# EAGLE board subsystem_wiring (EAGLE 9.7.0)

Size 214.3 x 239.77 mm. Coordinates in mm from the lower left corner, seen from the top.
Outline: 0,0 214.3,0 214.3,239.77 0,239.77 0,0
Copper layers (1*16): Top 0.035mm / dielectric 1.5mm / Bottom 0.035mm
Design rules "default": minimum track width 6mil, minimum drill 0.35mm, track to track 6mil, track to pad 6mil, pad to pad 6mil, via to via 6mil, smd to smd 6mil, copper to edge 40mil, drill to drill 6mil, minimum pad ring 10mil, minimum via ring 8mil, stop-mask expansion 4mil, vias tented up to drill 0mil, thermal gap 10mil

## Footprints (pad centres in the part's own frame; a part is rotated, then mirrored left to right if it is on the bottom)
BATTERY-GENERIC = drill 1.118 pad 3.15 octagon: + 2.54,0; - -2.54,0
CAP-THRU-2.54MM = drill 1.016 pad 1.88: 1 -1.27,0; 2 1.27,0
DIODE-AXIAL = drill 1: 1 -5.08,0; 2 5.08,0
1X02 = drill 1.016 long: 1 -1.27,0; 2 1.27,0
WS2812-STRIP = drill 1.016 long: 1 -3.81,0; 2 -1.27,0; 3 1.27,0; 4 3.81,0
MOTOR = drill 1.118 pad 3.15 octagon: + 2.54,0; - -2.54,0
RESAD1016W63L850D250B = drill 0.83 pad 1.43: 1 -5.08,0; 2 5.08,0
HA-06-SM065 = drill 1 pad 1.676: 1 -2.54,-2.54; 2 0,2.54; 3 2.54,-2.54
SWITCH-MOMENTARY-PTH-6.5MM = drill 1.016 pad 1.88: 1 -3.251,2.261; 2 3.251,2.261; 3 -3.251,-2.261; 4 3.251,-2.261
TO92 = drill 0.813 octagon: 1 -1.27,0; 2 0,1.905; 3 1.27,0
TO220BV = drill 1.016 long: D 0,-2.54; G -2.54,-2.54; S 2.54,-2.54
ARDUINO-UNO-R3-SHIELD = drill 1.016 pad 1.88: 3.3V 24.13,-2.54; 5V 24.13,0; A0 24.13,12.7; A1 24.13,15.24; A2 24.13,17.78; A3 24.13,20.32; A4 24.13,22.86; A5 24.13,25.4; AREF -24.13,-13.97; D2 -24.13,20.32; D3 -24.13,17.78; D4 -24.13,15.24; D5 -24.13,12.7; D6 -24.13,10.16; D7 -24.13,7.62; D8 -24.13,3.81; D9 -24.13,1.27; D10 -24.13,-1.27; D11 -24.13,-3.81; D12 -24.13,-6.35; D13 -24.13,-8.89; GND@0 24.13,2.54; GND@1 24.13,5.08; GND@2 -24.13,-11.43; IOREF 24.13,-7.62; NC 24.13,-10.16; RES 24.13,-5.08; RX -24.13,25.4; SCL -24.13,-19.05; SDA -24.13,-16.51; TX -24.13,22.86; VIN 24.13,7.62
JHD-162A = drill 1.016 long: 1 -19.05,0; 2 -16.51,0; 3 -13.97,0; 4 -11.43,0; 5 -8.89,0; 6 -6.35,0; 7 -3.81,0; 8 -1.27,0; 9 1.27,0; 10 3.81,0; 11 6.35,0; 12 8.89,0; 13 11.43,0; 14 13.97,0; 15 16.51,0; 16 19.05,0

## Placement (x,y rotation side)
BAT1  6V  [BATTERY-GENERIC]  193.46,134.9 0 top
C1  1000u  [CAP-THRU-2.54MM]  118.84,211.82 330 top
D1  DIODEDIODE-AXIAL  [DIODE-AXIAL]  13.5,71.18 0 top
DCONVEYOR_MOTOR_DIODE  DIODEDIODE-AXIAL  [DIODE-AXIAL]  207.97,167.8 90 top
L1  LIGHTBULB  [1X02]  102.29,43.97 0 top
LEDLED_STRIP  WS2812B_STRIP  [WS2812-STRIP]  115.59,199.45 270 top
MCONVEYOR_FAN_MOTOR  MOTOR_HDR  [MOTOR]  192.09,172.73 0 top
MCOOLING_FAN  MOTOR_HDR  [MOTOR]  8.26,86.3 0 top
P1  BATTERYGENERIC  [BATTERY-GENERIC]  103.61,8.26 180 top
R1  220  [RESAD1016W63L850D250B]  95.33,123.08 0 top
R6  1k  [RESAD1016W63L850D250B]  23.13,100.32 270 top
RCONVEYOR_MOTOR_RESISTOR  1k  [RESAD1016W63L850D250B]  131.36,175.05 0 top
RHEATING_ELEMENT_GATE_RESISTOR_1  100k  [RESAD1016W63L850D250B]  87.79,82.18 0 top
RHEATING_ELEMENT_RESISTOR_2  220  [RESAD1016W63L850D250B]  98.1,113.43 90 top
RLED_STRIP_RESISTOR  470  [RESAD1016W63L850D250B]  104.98,181.38 0 top
RPOTBAKE_KNOB  250k  [HA-06-SM065]  75.74,103.18 0 top
SCANCEL_BUTTON  SWITCH_MOMENTARY  [SWITCH-MOMENTARY-PTH-6.5MM]  138.14,151.82 90 top
SCONFIRM_BUTTON  SWITCH_MOMENTARY  [SWITCH-MOMENTARY-PTH-6.5MM]  122.07,152.36 90 top
T4  NPN  [TO92]  33.81,90.73 0 top
TCONVEYOR_MOTOR_TRANSISTOR  NPN  [TO92]  157.13,176.97 0 top
THEATING_ELEMENT_KNOB_(REPLACE_W/_SSR)  NMOSFET  [TO220BV]  131.17,87.37 0 top
UARDUINO  ARDUINO-UNO-R3-SHIELD  [ARDUINO-UNO-R3-SHIELD]  65.74,159.64 270 top
ULCD_DISPLAY  LCD-16X2JHD-162A  [JHD-162A]  48.06,232.23 0 top

## Library data of the parts
BAT1 C1 D1 DCONVEYOR_MOTOR_DIODE L1 LEDLED_STRIP MCONVEYOR_FAN_MOTOR MCOOLING_FAN P1 R1 R6 RCONVEYOR_MOTOR_RESISTOR RHEATING_ELEMENT_GATE_RESISTOR_1 RHEATING_ELEMENT_RESISTOR_2 RLED_STRIP_RESISTOR RPOTBAKE_KNOB SCANCEL_BUTTON SCONFIRM_BUTTON UARDUINO ULCD_DISPLAY = Tinkercad
T4 TCONVEYOR_MOTOR_TRANSISTOR = Tinkercad; CATEGORY: Transistor; SUB-CATEGORY: BJT; TYPE: NPN
THEATING_ELEMENT_KNOB_(REPLACE_W/_SSR) = Tinkercad; CATEGORY: Transistor; SUB-CATEGORY: MOSFET; TYPE: N-Channel

## Nets
BAT1+: BAT1.+ DCONVEYOR_MOTOR_DIODE.2 MCONVEYOR_FAN_MOTOR.+
BAT1-: BAT1.- C1.2 LEDLED_STRIP.3 P1.- RHEATING_ELEMENT_GATE_RESISTOR_1.1 RPOTBAKE_KNOB.1 SCANCEL_BUTTON.4 SCONFIRM_BUTTON.4 T4.3 TCONVEYOR_MOTOR_TRANSISTOR.3 THEATING_ELEMENT_KNOB_(REPLACE_W/_SSR).S UARDUINO.GND@0 UARDUINO.GND@1 UARDUINO.GND@2 ULCD_DISPLAY.1 ULCD_DISPLAY.3 ULCD_DISPLAY.16
L1_2: L1.2 THEATING_ELEMENT_KNOB_(REPLACE_W/_SSR).D
LEDLED_STRIP_DIN: LEDLED_STRIP.1 RLED_STRIP_RESISTOR.2
MCONVEYOR_FAN_MOTOR_-: DCONVEYOR_MOTOR_DIODE.1 MCONVEYOR_FAN_MOTOR.- TCONVEYOR_MOTOR_TRANSISTOR.1
MCOOLING_FAN_+: D1.2 MCOOLING_FAN.+
MCOOLING_FAN_-: D1.1 MCOOLING_FAN.- T4.1
P1+: L1.1 P1.+
T4_B: R6.2 T4.2
TCONVEYOR_MOTOR_TRANSISTOR_B: RCONVEYOR_MOTOR_RESISTOR.2 TCONVEYOR_MOTOR_TRANSISTOR.2
THEATING_ELEMENT_KNOB_(REPLACE_W/_SSR)_G: RHEATING_ELEMENT_GATE_RESISTOR_1.2 RHEATING_ELEMENT_RESISTOR_2.1 THEATING_ELEMENT_KNOB_(REPLACE_W/_SSR).G
UARDUINO_5V: C1.1 LEDLED_STRIP.2 R1.1 RPOTBAKE_KNOB.3 UARDUINO.5V ULCD_DISPLAY.2
UARDUINO_A0: RPOTBAKE_KNOB.2 UARDUINO.A0
UARDUINO_D2: UARDUINO.D2 ULCD_DISPLAY.14
UARDUINO_D3: UARDUINO.D3 ULCD_DISPLAY.13
UARDUINO_D4: UARDUINO.D4 ULCD_DISPLAY.12
UARDUINO_D5: UARDUINO.D5 ULCD_DISPLAY.11
UARDUINO_D6: RLED_STRIP_RESISTOR.1 UARDUINO.D6
UARDUINO_D7: SCONFIRM_BUTTON.2 UARDUINO.D7
UARDUINO_D8: RHEATING_ELEMENT_RESISTOR_2.2 UARDUINO.D8
UARDUINO_D9: R6.1 UARDUINO.D9
UARDUINO_D10: RCONVEYOR_MOTOR_RESISTOR.1 UARDUINO.D10
UARDUINO_D11: UARDUINO.D11 ULCD_DISPLAY.6
UARDUINO_D12: UARDUINO.D12 ULCD_DISPLAY.4
UARDUINO_D13: SCANCEL_BUTTON.2 UARDUINO.D13
ULCD_DISPLAY_LED+: R1.2 ULCD_DISPLAY.15

## Tracks (layer width: path | path; a pad name or v marks a point on that pad's centre or on a via)
BAT1+  (2 unrouted)
BAT1-  (16 unrouted)
L1_2  (1 unrouted)
LEDLED_STRIP_DIN  (1 unrouted)
MCONVEYOR_FAN_MOTOR_-  (2 unrouted)
MCOOLING_FAN_+  (1 unrouted)
MCOOLING_FAN_-  (2 unrouted)
P1+  (1 unrouted)
T4_B  (1 unrouted)
TCONVEYOR_MOTOR_TRANSISTOR_B  (1 unrouted)
THEATING_ELEMENT_KNOB_(REPLACE_W/_SSR)_G  (2 unrouted)
UARDUINO_5V  (5 unrouted)
UARDUINO_A0  (1 unrouted)
UARDUINO_D2  (1 unrouted)
UARDUINO_D3  (1 unrouted)
UARDUINO_D4  (1 unrouted)
UARDUINO_D5  (1 unrouted)
UARDUINO_D6  (1 unrouted)
UARDUINO_D7  (1 unrouted)
UARDUINO_D8  (1 unrouted)
UARDUINO_D9  (1 unrouted)
UARDUINO_D10  (1 unrouted)
UARDUINO_D11  (1 unrouted)
UARDUINO_D12  (1 unrouted)
UARDUINO_D13  (1 unrouted)
ULCD_DISPLAY_LED+  (1 unrouted)